# Altium PCB 无线传感K412.PcbDoc (part 2 of 2)
Units mm, origin at the board's own origin, x right, y up, seen from the top; angles counter-clockwise.
Board outline 54.33 x 73.61 mm, 2 copper layers (Top Layer, Bottom Layer); 38 components, 69 nets, 149 pads, 71 vias.
Unrouted connection lines stored in the file: 1.
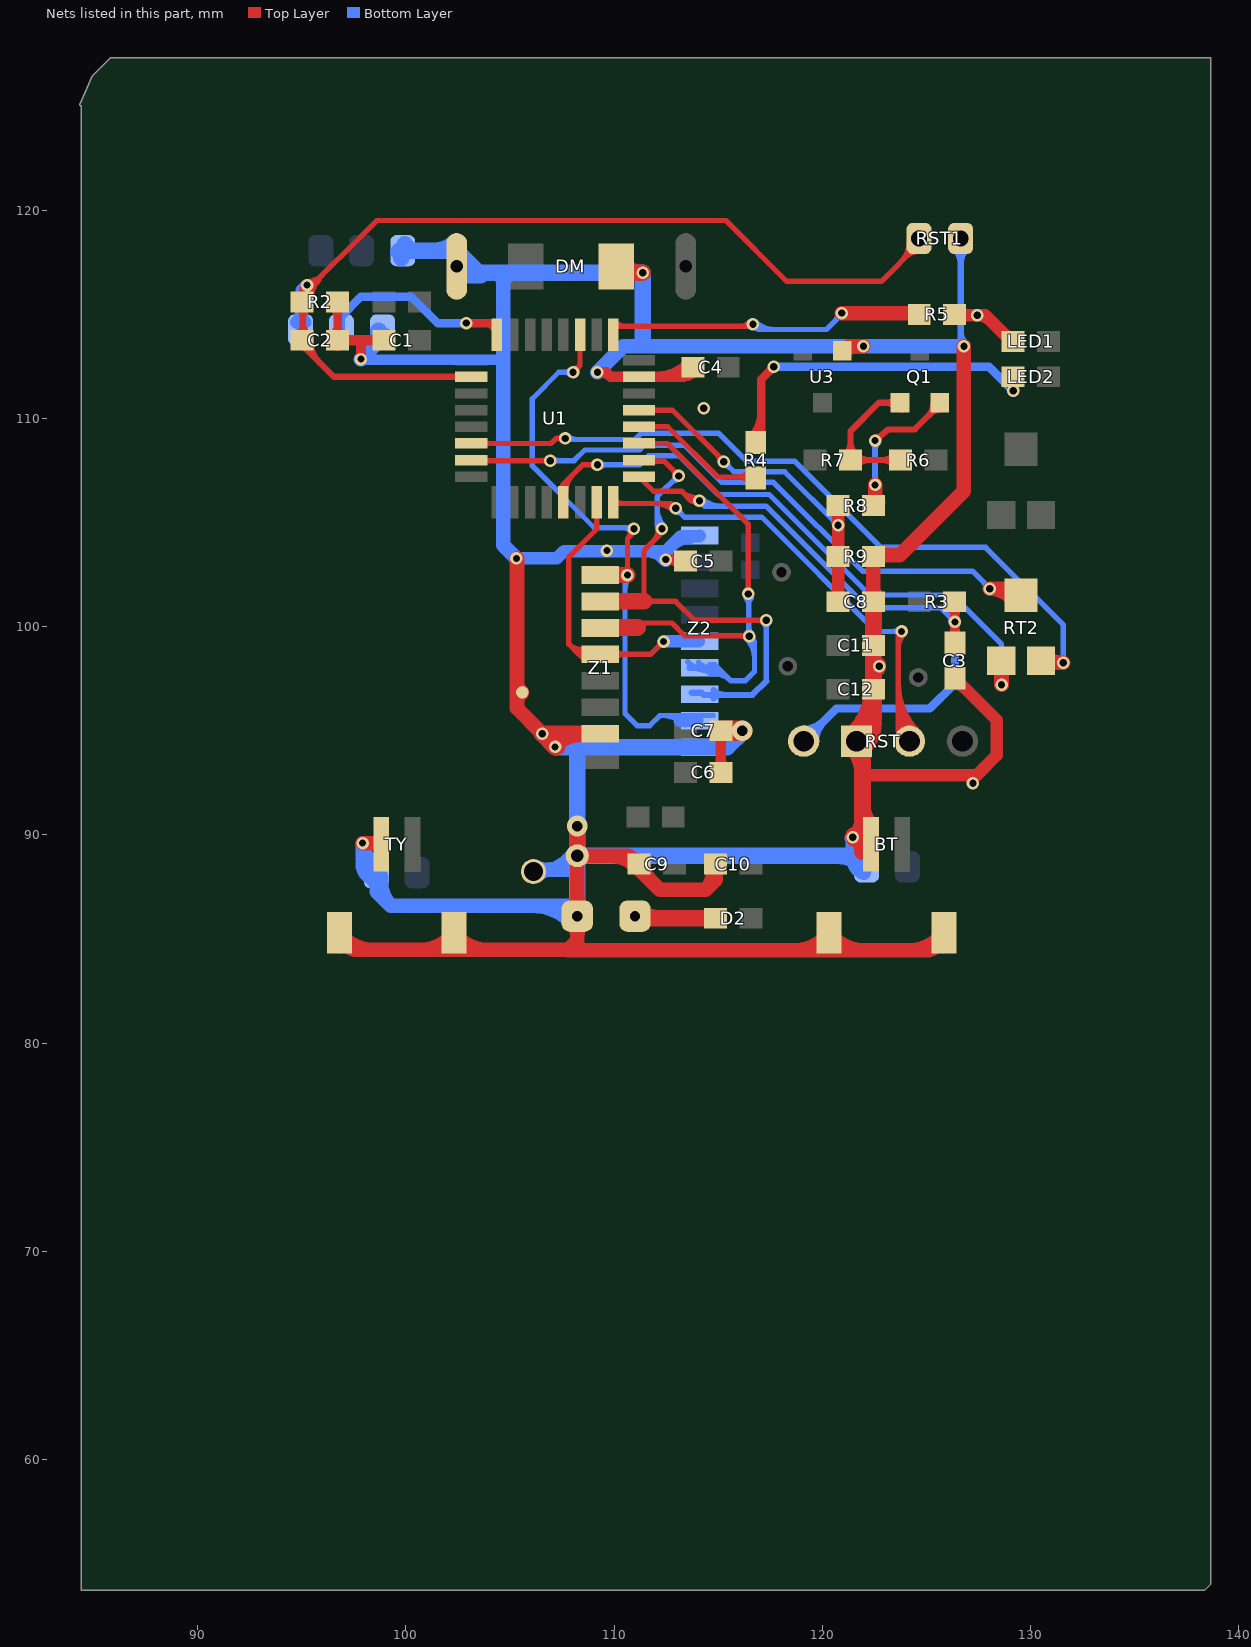
[diagram p2: the nets of this part, all layers, seen from the top]

## Via types
v1: diameter 0.6, hole 0.35, Top Layer to Bottom Layer, 68 vias
v2: diameter 1, hole 0.5, Top Layer to Bottom Layer, 2 vias
v3: diameter 0.9, hole 0.5, Top Layer to Bottom Layer, 1 vias

## Nets (pads, with @x,y where several pads share a name; then routed paths per layer and width w, separated by ;. In a path a pad name is that pad's centre, name@x,y a point inside that pad or via, vN(x,y) a via of type N, cw(c..) or ccw(c..) an arc to the next point about the centre after c; other vN are vias at no path point) (continued)
GND: BT.1 C1.2 C2.2 C3.1 C4.2 C5.2 C6.2 C7.2 C8.1 C9.1 C10.1 C11.1 C12.1 DM.2 pad.0@96.81,85.306 pad.0@98.577,88.189 pad.0@98.882,114.249 pad.0@99.847,118.059 pad.0@102.314,85.306 pad.0@102.442,117.3 pad.0@106.121,88.24 pad.0@108.229,89.002 pad.0@114.1,94.217 pad.0@120.327,85.306 pad.0@122.123,88.468 pad.0@125.831,85.306 pad.3@105.588,96.85 pad.3@108.229,86.1 R2.2 R9.1 RST1.2 RST.2 TY.1 U1.7 U3.1 Z1.7 Z2.8 | length 317.5
  Top Layer w0.254: DM.2@109.995,117.488 110.2,117.282 110.49,116.992 DM.2@110.617,116.865
  Top Layer w0.4: C2.2@96.497,113.969 ccw(c95.952,114.514) 96.723,114.514 ; R2.2@96.497,115.388 cw(c95.952,114.843) 96.723,114.843 ; C2.2@96.723,113.436 R2.2@96.723,115.788 ; 96.723,114.448 ccw(c97.401,114.448) C2.2@96.922,113.969 ; 96.723,114.909 cw(c97.401,114.909) R2.2@96.922,115.388 ; TY.1@98.755,90.5 98.755,89.713 98.781,89.687 TY.1@98.781,89.078
  Top Layer w0.5: C2.2@96.71,113.757 C1.2@99.043,113.757 ; C2.2@96.936,113.58 cw(c97.363,113.153) 97.363,113.757 cw(c97.363,114.361) C2.2@96.936,113.934 ; v1(97.841,112.852) 97.841,113.741 ; C1.2@98.723,113.58 ccw(c98.296,113.153) 98.296,113.757 ccw(c98.296,114.361) C1.2@98.723,113.934 ; v1(109.195,112.217) 109.626,112.217 109.836,112.007 ; v1@109.208,112.169 cw(c109.385,111.557) 109.836,112.007 ; 112.034,112.007 ccw(c112.034,114.156) C4.2@113.553,112.637 ; v1(112.471,103.226) C5.2@113.425,103.226 ; v1@112.587,103.226 cw(c112.587,102.362) C5.2@113.198,102.973 ; C4.2@113.241,112.007 ccw(c113.241,112.949) C4.2@113.907,112.283 ; C4.2@113.78,112.471 113.316,112.007 109.836,112.007 ; C6.2@114.948,93.177 ccw(c114.521,93.604) 115.125,93.604 ccw(c115.729,93.604) C6.2@115.302,93.177 ; C7.2@114.948,94.823 cw(c114.521,94.396) 115.125,94.396 cw(c115.729,94.396) C7.2@115.302,94.823 ; C6.2@115.125,93 C7.2@115.125,95 ; v2(116.15,95) v2@116.18,94.971
  Top Layer w0.6: 122.352,92.862 127.406,92.862 128.372,93.828 128.372,95.513 C3.1@126.36,97.524 ; C3.1@126.36,97.274 cw(c126.36,96.671) C3.1@126.787,97.097
  Top Layer w0.7: pad.0@96.81,85.306 97.636,84.48 ; pad.0@96.884,84.667 cw(c97.105,83.949) 97.636,84.48 ; pad.0@96.987,85.083 ccw(c98.441,86.537) 98.441,84.48 ; pad.0@97.055,84.955 ccw(c97.636,85.073) 97.636,84.48 ; v1(97.917,89.611) 98.654,89.611 TY.1@98.755,89.713 ; 100.683,84.48 ccw(c100.683,86.537) pad.0@102.137,85.083 ; pad.0@102.491,85.083 ccw(c103.945,86.537) 103.945,84.48 ; 105.334,96.358 cw(c106.08,96.358) pad.3@105.552,96.886 ; 105.334,97.343 ccw(c106.08,97.343) pad.3@105.552,96.815 ; v1@105.334,103.276 105.334,96.081 v1(106.553,94.862) ; pad.3@107.947,85.817 cw(c107.264,85.134) 108.229,85.134 cw(c109.195,85.134) pad.3@108.512,85.817 ; pad.3@107.947,86.383 ccw(c107.264,87.066) 108.229,87.066 ccw(c109.195,87.066) pad.3@108.512,86.383 ; 109.808,89.002 cw(c109.808,87.268) C9.1@111.033,88.494 ; 110.61,88.969 ccw(c111.139,89.498) C9.1@111.139,88.75 ; C9.1@110.989,88.597 ccw(c110.578,88.59) 110.578,89.002 ; C9.1@111.389,88.6 ccw(c112.407,88.6) 111.687,87.88 ; C10.1@114.68,88.553 cw(c113.588,88.19) 114.402,87.376 ; C10.1@114.872,88.6 114.872,87.847 114.402,87.376 ; 118.635,84.455 ccw(c118.635,86.598) pad.0@120.15,85.083 ; pad.0@120.504,85.083 ccw(c122.019,86.598) 122.019,84.455 ; U3.1@121.021,113.204 cw(c121.642,112.583) 121.642,113.462 ; U3.1@121.05,113.25 121.262,113.462 v1(121.971,113.462) ; C8.1@122.45,101.606 122.45,103.429 123.723,103.429 126.797,106.502 v1(126.797,113.462) ; 124.139,84.455 ccw(c124.139,86.598) pad.0@125.654,85.083 ; pad.0@125.586,84.954 cw(c124.98,85.072) 124.98,84.455 ; pad.0@125.766,84.665 ccw(c125.554,83.881) 124.98,84.455 ; pad.0@125.831,85.306 124.98,84.455 ; 97.636,84.48 107.798,84.48 ; 107.798,84.48 107.772,84.455 124.98,84.455 ; 107.798,84.48 108.229,84.912 ; 107.798,84.48 108.229,84.48 108.229,84.912 ; 108.229,84.912 pad.3@108.229,86.1 pad.0@108.229,89.002 110.578,89.002 ; 110.578,89.002 110.979,88.6 C9.1@111.189,88.6 111.189,88.378 112.192,87.376 114.402,87.376
  Top Layer w0.8: v1@106.553,94.837 v1(107.163,94.227) ; v1@107.092,94.298 cw(c108.454,92.935) Z1.7@108.454,94.862 ; v1@107.263,94.228 ccw(c106.622,94.222) 106.622,94.862 Z1.7@109.322,94.862 ; pad.0@108.229,89.002 v2(108.229,90.424) ; DM.2@109.757,116.615 DM.2@110.134,116.992 ; DM.2@109.906,116.992 DM.2@110.134,116.992 ; DM.2@110.2,117.304 110.2,117.282 110.2,117.058 DM.2@110.134,116.992 ; DM.2@110.418,116.732 cw(c111.047,116.103) 111.047,116.992 ; DM.2@110.418,117.368 ccw(c111.325,118.275) v1@111.325,116.992 ; v1(111.379,116.992) 110.49,116.992 DM.2@110.134,116.992 ; RST.2@121.393,94.253 cw(c120.099,92.959) 121.928,92.959 ; RST.2@121.393,94.748 ccw(c118.84,97.3) C12.1@122.45,97.3 ; v1@121.519,89.973 cw(c120.995,89.201) 121.928,89.201 ; v1@121.534,89.82 ccw(c120.58,90.773) 121.928,90.773 ; 121.928,89.382 121.928,94.212 RST.2@121.64,94.5 121.64,94.819 122.45,95.629 ; 121.928,91.392 ccw(c123.253,91.392) BT.1@122.316,90.456 ; RST.2@121.958,94.182 ccw(c120.771,95.369) 122.45,95.369 ; RST.2@121.99,94.503 cw(c123.56,94.518) 122.45,95.629 ; 122.45,97.652 cw(c123.176,97.652) v1@122.662,98.166 ; 122.45,98.537 ccw(c123.176,98.537) v1@122.662,98.024 ; C8.1@122.45,101.606 122.45,95.629
  Top Layer w1: C7.2@115.125,95 v2(116.15,95)
  Bottom Layer w0.3: RST1.2@126.322,118.175 cw(c125.554,117.407) 126.64,117.407 cw(c127.726,117.407) RST1.2@126.958,118.175 ; RST1.2@126.441,118.643 126.64,118.445 v1@126.64,113.462 ; 126.64,114.202 ccw(c127.537,114.202) v1@126.903,113.568
  Bottom Layer w0.5: v1(97.841,112.852) 97.841,112.827 104.75,112.827 ; pad.0@106.296,88.543 ccw(c106.719,89.275) 106.937,88.458 ccw(c107.156,87.642) pad.0@106.424,88.065 ; pad.0@106.369,87.992 cw(c106.966,87.395) 106.966,88.24 cw(c106.966,89.085) pad.0@106.369,88.487 ; 107.114,88.24 ccw(c107.114,89.828) pad.0@108.39,88.883 ; pad.0@107.988,89.18 cw(c106.121,90.563) pad.0@106.121,88.24 108.229,88.24 ; pad.0@108.017,88.789 cw(c107.505,88.277) 108.229,88.277 cw(c108.954,88.277) pad.0@108.442,88.789
  Bottom Layer w0.6: v1(105.308,103.276) 107.239,103.276 107.594,103.632 112.319,103.632 ; 111.49,103.632 cw(c111.49,102.244) v1(112.471,103.226) cw(c113.391,103.226) 112.741,103.876 ; v1@112.281,103.416 113.217,104.353 114.076,104.353 Z2.8@114.1,104.377 ; 112.757,103.892 cw(c113.625,103.025) Z2.8@113.625,104.252
  Bottom Layer w0.7: v1(97.841,112.852) pad.0@98.831,113.843 ; 97.917,88.633 ccw(c98.678,88.633) pad.0@98.432,87.913 ; 98.31,113.321 ccw(c97.532,114.099) pad.0@98.632,114.099 ; pad.0@98.401,87.862 cw(c97.913,87.374) 98.603,87.374 ; pad.0@98.571,88.589 cw(c98.547,89.479) 97.917,88.849 ; pad.0@98.577,88.189 97.917,88.849 ; pad.0@98.603,88.468 98.603,87.274 99.277,86.6 ; pad.0@98.658,88.575 cw(c99.011,89.611) v1(97.917,89.611) 97.917,88.849 ; pad.0@98.824,87.999 ccw(c100.42,87.743) 99.277,86.6 ; pad.0@102.442,116.891 pad.0@102.442,117.3 ; 104.673,116.688 104.673,103.911 v1(105.308,103.276) ; 106.057,86.6 cw(c106.057,83.927) pad.3@107.947,85.817 ; pad.3@108.229,86.6 99.277,86.6 ; v1(109.195,112.217) 110.439,113.462 v1(121.971,113.462) 126.64,113.462 v1(126.797,113.462) ; v1@112.281,103.416 v1(112.471,103.226) ; 121.463,88.912 ccw(c122.223,88.912) pad.0@121.978,88.192 ; 121.463,89.002 v1(121.463,89.891) ccw(c122.557,89.891) pad.0@122.204,88.855 ; pad.0@122.116,88.868 cw(c122.092,89.758) 121.463,89.129 pad.0@122.123,88.468
  Bottom Layer w0.8: pad.0@98.679,114.198 pad.0@98.692,114.211 ; pad.0@98.857,113.792 pad.0@99.009,113.944 ; pad.0@99.644,118.008 pad.0@99.657,118.021 ; pad.0@99.771,117.704 pad.0@99.771,118.11 ; pad.0@99.936,118.351 100.228,118.059 102.413,118.059 103.581,116.891 ; 101.378,118.059 ccw(c101.378,119.464) pad.0@102.371,118.471 ; pad.0@102.276,117.98 cw(c102.351,117.671) pad.0@102.576,117.896 ; pad.0@102.442,116.891 103.581,116.891 ; pad.0@102.466,117.203 cw(c102.746,116.056) 103.581,116.891 ; pad.0@102.517,117.367 ccw(c103.581,118.32) 103.581,116.891 ; 104.673,116.688 104.978,116.992 ; v1(106.553,94.862) 107.198,94.217 108.229,94.217 ; pad.3@107.982,86.347 ccw(c107.384,86.945) 108.229,86.945 ccw(c109.074,86.945) pad.3@108.477,86.347 ; pad.3@108.229,86.6 108.229,88.24 pad.0@108.229,89.002 ; 111.379,113.563 v1(111.379,116.992) 104.978,116.992 ; v2@116.18,94.971 115.426,94.217 pad.0@114.1,94.217 108.229,94.217 ; 120.715,89.002 cw(c120.715,87.21) pad.0@121.982,88.477 ; v1@121.463,89.84 121.793,89.84 ; pad.0@121.925,88.594 ccw(c121.463,88.536) 121.463,89.002 pad.0@108.229,89.002 ; 103.581,116.891 103.48,116.992 104.978,116.992 ; pad.0@108.229,89.002 v2(108.229,90.424) 108.229,94.217
  other v1: 127.229,92.481 122.733,98.095 109.652,103.657 114.3,110.49
HX: 
IRQ: U1.11 Z1.1 Z2.1 | length 36
  Top Layer w0.254: v1(108.026,112.217) 108.363,112.554 U1.11@108.363,114.236 ; v1@108.026,112.39 ccw(c108.026,112.808) 108.322,112.513 ccw(c108.617,112.217) v1@108.199,112.217 ; U1.11@108.276,113.413 cw(c108.066,113.203) 108.363,113.203 cw(c108.66,113.203) U1.11@108.45,113.413 ; v1@110.513,102.604 ccw(c110.218,102.9) 110.635,102.9 ccw(c111.053,102.9) v1@110.758,102.604 ; 110.635,104.235 ccw(c110.279,104.591) v1@110.776,104.671 ; v1@110.668,102.514 v1(110.635,102.482) 110.635,104.235 v1@111.036,104.635
  Top Layer w0.76: Z1.1@109.322,102.482 v1(110.635,102.482)
  Bottom Layer w0.254: v1@107.904,112.095 ccw(c107.609,111.8) 107.609,112.217 ccw(c107.609,112.635) v1@107.904,112.34 ; v1(108.026,112.217) 107.34,112.217 106.07,110.947 106.07,107.721 109.042,104.75 v1@110.998,104.75 ; 110.407,104.75 cw(c110.407,104.159) v1@110.825,104.576 ; 110.515,101.775 cw(c111.343,101.775) v1@110.758,102.36 ; v1@110.719,102.514 110.515,102.311 110.515,95.826 111.091,95.25 111.709,95.25 112.192,95.733 Z2.1@114.757,95.733 ; 112.313,95.733 cw(c112.313,94.175) Z2.1@113.414,95.276 ; 112.926,95.733 cw(c112.926,94.788) Z2.1@113.594,95.456
  Bottom Layer w0.6: 113.157,95.479 Z2.1@113.995,95.479
  other v1: 110.947,104.699
L+: 
L-: 
L-G-D: 
L-R-D: 
L-R-R: LED1.1 R5.2 | length 4.8
  Top Layer w0.6: R5.2@126.35,114.96 v1(127.432,114.96) ; R5.2@126.541,115.141 ccw(c126.978,115.578) 126.978,114.96 ; 128.082,114.691 ccw(c127.432,114.041) v1(127.432,114.96) ; LED1.1@128.713,114.06 ccw(c129.1,114.448) LED1.1@129.1,113.9 ; LED1.1@128.987,113.787 127.813,114.96 v1(127.432,114.96)
LED2: R4.1 U1.4 | length 8.7
  Top Layer w0.254: U1.4@111.188,109.6 112.574,109.6 114.986,107.188 116.637,107.188 R4.1@116.916,107.467 ; U1.4@111.8,109.513 cw(c112.01,109.303) 112.01,109.6 cw(c112.01,109.897) U1.4@111.8,109.687 ; 115.871,107.188 ccw(c115.871,108.129) R4.1@116.536,107.464 ; 115.928,107.188 cw(c115.928,106.328) R4.1@116.536,106.936
LED2-R: LED2.1 R4.2 | length 18.5
  Top Layer w0.4: R4.2@116.588,109.112 ccw(c115.427,110.273) 117.069,110.273 ; R4.2@117.069,108.534 117.069,111.887 v1(117.665,112.484) ; LED2.1@129.148,112.002 LED2.1@129.15,112
  Top Layer w0.6: LED2.1@129.009,111.859 cw(c128.645,111.495) v1@129.159,111.495 ; v1(129.159,111.328) LED2.1@129.159,112
  Bottom Layer w0.4: v1(117.665,112.484) 128.003,112.484 v1(129.159,111.328)
MISO: U1.2 Z1.2 Z2.2 | length 33.7
  Top Layer w0.254: Z1.2@109.169,101.219 112.954,101.219 113.868,100.305 v1(117.297,100.305) ; Z1.2@110.007,101.001 cw(c110.533,100.476) 110.533,101.219 ; Z1.2@110.007,101.423 ccw(c110.499,101.915) 110.499,101.219 ; U1.2@110.896,107.95 112.395,107.95 v1@113.081,107.264 ; 111.43,101.22 111.43,103.657 112.293,104.521 v1(112.293,104.699) ; U1.2@111.8,108.087 ccw(c112.13,108.418) 112.13,107.95 ; 111.872,104.1 ccw(c111.273,104.699) v1@112.12,104.699 ; v1@112.933,107.239 ccw(c112.516,107.239) 112.811,107.534 ccw(c113.106,107.829) v1@113.106,107.412 ; v1@117.175,100.182 ccw(c116.88,99.887) 116.88,100.305 ccw(c116.88,100.722) v1@117.175,100.427
  Top Layer w0.8: Z1.2@109.652,101.22 111.43,101.22
  Bottom Layer w0.254: 112.065,105.055 ccw(c112.65,105.055) v1@112.236,104.642 ; 112.065,105.668 ccw(c113.263,105.668) v1@112.416,104.821 ; v1@112.236,104.699 112.065,104.87 112.065,106.248 v1@113.081,107.264 ; 112.724,106.908 cw(c113.106,106.526) v1@113.106,107.066 ; 112.847,107.03 ccw(c112.638,107.239) v1@112.933,107.239 ; v1@117.175,100.182 cw(c116.88,99.887) 117.297,99.887 cw(c117.715,99.887) v1@117.42,100.182 ; 117.297,97.384 v1(117.297,100.305)
  Bottom Layer w0.3: Z2.2@113.722,96.825 114.198,96.825 114.3,96.723 116.637,96.723 117.297,97.384 ; Z2.2@114.769,96.563 cw(c115.157,96.175) 115.157,96.723 ; Z2.2@114.769,96.951 ccw(c115.32,97.502) 115.32,96.723
  other v1: 113.106,107.239
MOSI: U1.3 Z1.3 Z2.3 | length 39.5
  Top Layer w0.254: Z1.3@108.915,99.974 109.118,100.178 112.776,100.178 113.386,99.568 v1@116.459,99.568 ; Z1.3@109.828,99.911 cw(c110.472,99.267) 110.472,100.178 ; Z1.3@110.007,99.731 cw(c111.085,98.654) 111.085,100.178 ; 111.125,99.974 111.201,100.051 ; U1.3@111.188,108.8 112.561,108.8 116.434,104.927 v1(116.434,101.575) ; U1.3@111.8,108.713 cw(c112.01,108.503) 112.01,108.8 cw(c112.01,109.097) U1.3@111.8,108.887 ; v1@116.332,101.727 ccw(c116.098,101.961) 116.429,101.961 ; 116.438,101.982 ccw(c116.943,101.982) v1@116.586,101.625 ; 116.005,99.568 cw(c116.005,99.064) 116.362,99.42 ccw(c116.005,99.064) 116.005,99.568 ; 116.128,99.568 ccw(c116.128,99.899) 116.362,99.665 cw(c116.128,99.899) 116.128,99.568
  Top Layer w0.8: Z1.3@109.322,99.96 111.125,99.96
  Bottom Layer w0.254: Z2.3@113.539,98.314 ccw(c114.681,99.456) Z2.3@114.681,97.841 ; Z2.3@114.049,98.287 ccw(c114.757,98.995) Z2.3@114.757,97.993 ; Z2.3@114.579,98.171 114.833,98.171 115.595,97.409 ; Z2.3@114.581,97.983 cw(c114.694,97.222) 115.238,97.766 ; Z2.3@114.618,97.732 cw(c114.786,96.599) 115.595,97.409 ; v1@116.337,101.367 cw(c116.041,101.071) 116.459,101.071 cw(c116.877,101.071) v1@116.581,101.367 ; v1@116.362,99.42 cw(c115.454,98.512) 116.738,98.512 ; 116.459,101.244 116.459,99.568 116.738,99.289 116.738,97.841 116.307,97.409 115.595,97.409 ; v1@116.464,99.469 cw(c115.8,98.806) 116.738,98.806 ; v1@116.542,99.6 cw(c116.067,99.125) 116.738,99.125 ; v1@116.649,99.488 ccw(c117.129,99.329) 116.691,99.076 ; v1@116.362,99.665 ccw(c116.128,99.899) 116.459,99.899 cw(c116.128,99.899) v1@116.362,99.665 ; 116.459,100.022 ccw(c116.963,100.022) 116.607,99.665 cw(c116.963,100.022) 116.459,100.022
  Bottom Layer w0.3: Z2.3@113.617,98.027 Z2.3@114.1,98.027
  other v1: 116.484,99.543
PB7: C8.2 R8.1 R9.2 U1.5 | length 18.6
  Top Layer w0.254: U1.5@111.188,110.4 112.79,110.4 v1(115.265,107.925) ; U1.5@111.8,110.313 cw(c112.01,110.103) 112.01,110.4 cw(c112.01,110.697) U1.5@111.8,110.487 ; v1@115.092,107.925 ccw(c114.675,107.925) 114.97,108.22 ccw(c115.265,108.515) v1@115.265,108.098
  Top Layer w0.6: C8.2@120.75,101.2 R9.2@120.75,103.378 R8.1@120.75,105.5
  Bottom Layer w0.254: v1@115.265,107.752 cw(c115.265,107.334) 115.561,107.629 cw(c115.856,107.925) v1@115.438,107.925 ; v1(115.265,107.925) 115.748,107.442 118.186,107.442 v1(120.752,104.877) ; v1@120.579,104.877 ccw(c120.161,104.877) 120.456,105.172 ccw(c120.752,105.467) v1@120.752,105.05
Q1-B: Q1.1 R6.2 R7.2 | length 12.9
  Top Layer w0.3: R7.2@121.102,108.247 ccw(c120.505,108.845) 121.35,108.845 ccw(c122.195,108.845) R7.2@121.597,108.247 ; R7.2@121.647,107.753 cw(c122.245,107.155) 122.245,108 cw(c122.245,108.845) R7.2@121.647,108.247 ; R6.2@123.453,107.753 ccw(c122.855,107.155) 122.855,108 ccw(c122.855,108.845) R6.2@123.453,108.247 ; Q1.1@123.518,110.538 ccw(c123.006,110.026) 123.006,110.75 ccw(c123.006,111.474) Q1.1@123.518,110.962 ; Q1.1@123.85,110.414 Q1.1@123.85,110.846 ; Q1.1@123.85,110.75 122.713,110.75 121.35,109.387 R7.2@121.35,108 R6.2@123.95,108
  Top Layer w0.4: Q1.1@123.85,110.541 Q1.1@123.85,110.846
Q1-E: Q1.2 R8.2 | length 10.1
  Top Layer w0.3: v1(122.53,108.941) 123.165,109.474 124.435,109.474 125.674,110.713 Q1.2@125.674,110.699 ; v1@122.543,109.09 ccw(c122.574,109.451) 122.807,109.174 ccw(c123.04,108.896) v1@122.679,108.928 ; R8.2@122.606,105.689 R8.2@122.631,105.715 ; 125.079,110.118 ccw(c124.472,110.725) Q1.2@125.33,110.725 ; 125.213,110.252 cw(c125.63,109.835) Q1.2@125.63,110.425
  Top Layer w0.7: R8.2@122.403,105.689 R8.2@122.682,105.969 ; R8.2@122.53,106.02 v1(122.53,106.807)
  Bottom Layer w0.3: v1@122.424,106.913 ccw(c122.167,107.169) 122.53,107.169 ccw(c122.892,107.169) v1@122.636,106.913 ; v1@122.424,108.835 cw(c122.167,108.578) 122.53,108.578 cw(c122.892,108.578) v1@122.636,108.835 ; v1(122.53,106.807) v1(122.53,108.941)
Q4-B: 
R1R: 
R5: 
R19: 
RST: C3.2 R3.2 RST.1 U1.1 | length 41.8
  Top Layer w0.254: U1.1@111.188,107.2 111.886,106.502 113.233,106.502 ; 113.598,106.138 ccw(c114.028,106.568) v1@114.107,105.965 ; v1@113.972,105.925 ccw(c113.69,105.654) 113.69,106.045 ; v1@113.972,106.165 cw(c113.69,106.436) 113.69,106.045 ; v1@114.074,106.217 cw(c113.943,107.212) 113.233,106.502 ; v1(114.097,106.045) 113.69,106.045 ; 113.233,106.502 113.69,106.045
  Top Layer w0.4: R3.2@126.138,100.988 cw(c125.589,100.439) v1@126.365,100.439 ; C3.2@126.148,99.486 ccw(c125.624,100.01) v1@126.365,100.01 ; v1@126.278,100.178 cw(c125.903,99.961) 126.322,99.849 ; v1@126.278,100.278 ccw(c125.908,100.492) 126.321,100.603 ; C3.2@126.365,99.136 R3.2@126.365,101.092 ; v1@126.365,99.986 ccw(c127.072,99.986) C3.2@126.572,99.486 ; v1@126.365,100.512 cw(c127.038,100.512) R3.2@126.562,100.988 ; 126.402,100.652 ccw(c126.878,100.524) v1@126.452,100.278 ; 126.406,99.833 cw(c126.846,99.951) v1@126.452,100.178
  Bottom Layer w0.254: v1@114.04,105.988 ccw(c114.514,106.463) 114.514,105.791 ; v1(114.097,106.045) 114.351,105.791 117.29,105.791 122.167,100.914 125.679,100.914 v1(126.365,100.228) ; v1@114.219,106.167 ccw(c115.128,107.076) 115.128,105.791 ; RST.1@119.572,94.182 RST.1@119.572,94.5 ; v1@126.192,100.228 ccw(c125.774,100.228) 126.07,100.524 ccw(c126.365,100.819) v1@126.365,100.401
  Bottom Layer w0.4: RST.1@119.1,94.5 120.672,96.072 125.155,96.072 126.365,97.282 v1(126.365,100.228) ; RST.1@119.1,95.05 ccw(c119.1,96.378) 120.039,95.439 ccw(c120.978,94.5) RST.1@119.65,94.5
RT1-S: 
RT1-X: 
RT2: 
RT2-S: 
RT2-X: 
SCK: U1.31 Z1.4 Z2.4 | length 19.6
  Top Layer w0.254: 108.107,98.877 ccw(c108.599,99.369) Z1.4@108.832,98.713 ; 108.392,98.593 ccw(c108.748,98.949) Z1.4@108.917,98.474 ; Z1.4@108.593,98.516 ccw(c108.313,98.343) 108.313,98.672 ; Z1.4@108.593,98.828 cw(c108.313,99.001) 108.313,98.672 ; Z1.4@108.747,98.953 cw(c108.45,99.789) 107.823,99.162 ; U1.31@109.076,105.363 cw(c108.866,105.153) 109.163,105.153 cw(c109.46,105.153) U1.31@109.25,105.363 ; U1.31@109.163,106.186 109.163,104.692 107.823,103.353 107.823,99.162 ; Z1.4@110.007,98.461 cw(c110.516,97.953) 110.516,98.672 cw(c110.516,99.391) Z1.4@110.007,98.883 ; v1@112.197,99.289 cw(c111.779,99.289) 112.074,98.993 cw(c112.37,98.698) v1@112.37,99.116 ; v1(112.37,99.289) 111.753,98.672 Z1.4@109.322,98.672 108.313,98.672 ; 107.823,99.162 108.313,98.672
  Bottom Layer w0.6: v1(112.37,99.289) 112.378,99.297 Z2.4@114.071,99.297
SWIM: RST.3 U1.32 | length 34.5
  Top Layer w0.254: U1.32@109.963,105.918 112.725,105.918 ; U1.32@110.05,106.062 ccw(c110.397,106.41) 110.397,105.918 ; 111.984,105.918 cw(c111.984,104.72) v1@112.831,105.567 ; 112.597,105.918 cw(c112.597,105.333) v1@113.011,105.747 ; v1@112.784,105.723 ccw(c112.573,105.766) 112.725,105.918 ; v1@112.92,105.859 cw(c112.878,106.07) 112.725,105.918 ; v1(112.954,105.689) 112.725,105.918 ; 123.647,95.451 ccw(c125.131,95.451) RST.3@124.082,94.402 ; 123.647,96.064 ccw(c125.744,96.064) RST.3@124.261,94.581 ; 123.647,96.677 ccw(c126.357,96.677) RST.3@124.441,94.761 ; 123.647,97.29 ccw(c126.97,97.29) RST.3@124.621,94.941 ; 123.647,98.985 cw(c124.587,98.985) v1@123.922,99.649 ; v1@123.661,99.669 cw(c123.551,99.588) 123.647,99.492 ; RST.3@123.665,94.85 ccw(c123.545,94.931) 123.647,95.033 ; RST.3@123.83,95.016 cw(c123.749,95.135) 123.647,95.033 ; v1@123.927,99.771 123.647,99.492 ; RST.3@124.18,94.5 123.647,95.033 ; 123.647,95.033 123.647,99.492
  Bottom Layer w0.254: v1@112.954,105.516 cw(c112.954,105.099) 113.249,105.394 cw(c113.544,105.689) v1@113.127,105.689 ; v1(112.954,105.689) 113.386,105.258 117.094,105.258 122.58,99.771 v1@123.927,99.771 ; v1@123.678,99.649 ccw(c123.382,99.354) 123.382,99.771 ccw(c123.382,100.189) v1@123.678,99.894
  other v1: 123.8,99.771
SWIM/FM: 
T-LED: R5.1 U1.9 | length 19.4
  Top Layer w0.254: U1.9@109.963,114.025 109.963,114.427 v1@116.662,114.427 ; U1.9@110.05,114.637 ccw(c110.556,115.144) 110.556,114.427 ; 115.999,114.427 ccw(c115.999,115.192) v1@116.54,114.651
  Top Layer w0.7: v1(120.929,115.062) 124.588,115.062 R5.1@124.65,115 ; 124.088,115.062 cw(c124.088,114.488) R5.1@124.494,114.894
  Bottom Layer w0.254: v1@116.605,114.471 ccw(c117.08,114.946) 117.08,114.275 ; v1(116.662,114.529) 116.916,114.275 120.193,114.275 v1@120.98,115.062 ; v1@116.785,114.651 ccw(c117.693,115.559) 117.693,114.275 ; 120.598,114.68 ccw(c120.216,115.062) v1@120.756,115.062 ; 120.721,114.803 cw(c120.929,114.594) v1@120.929,114.889
TEMP: 
WXCD: D2.2 pad.3@111,86.1 | length 4.5
  Top Layer w0.8: pad.3@111.247,86.347 ccw(c112.086,87.186) 112.086,86 ; pad.3@111.263,86.086 pad.3@111.277,86.1 ; pad.3@111.291,86 D2.2@114.872,86
Y30: 
Y>: 
YS: C2.1 pad.0@94.945,114.249 R2.1 RST1.1 U1.18 | length 61.8
  Top Layer w0.254: v1@95.083,116.363 cw(c94.569,116.226) 94.945,115.849 98.603,119.507 115.367,119.507 118.288,116.586 122.834,116.586 124.639,118.39 RST1.1@124.639,118.643 ; R2.1@95.179,115.6 cw(c96.344,115.6) v1@95.52,116.424 ; v1@95.248,116.327 ccw(c95.265,116.973) 95.813,116.632 ; v1@95.25,116.581 ccw(c95.25,117.612) 95.979,116.883 ; R2.1@95.433,115.6 cw(c97.211,115.6) 95.954,116.858 ; 123.759,117.51 ccw(c122.775,118.493) RST1.1@124.166,118.493 ; 124.007,117.759 cw(c124.639,117.127) RST1.1@124.639,118.02 ; RST1.1@124.192,117.944 ccw(c123.642,118.493) RST1.1@124.42,118.493
  Top Layer w0.3: C2.1@94.812,114.004 ccw(c94.246,114.571) 95.047,114.571 ; R2.1@94.812,115.353 cw(c94.246,114.786) 95.047,114.786 ; R2.1@94.856,115.885 ccw(c94.591,116.256) v1@95.047,116.256 ; C2.1@95.047,113.411 v1@95.047,116.256 ; 95.047,114.633 ccw(c95.936,114.633) C2.1@95.307,114.004 ; 95.047,114.724 cw(c95.936,114.724) R2.1@95.307,115.353 ; R2.1@95.047,115.556 cw(c96.103,115.556) v1@95.356,116.302 ; C2.1@95.11,113.757 ccw(c95.913,113.757) 95.345,113.189 ; C2.1@95.193,113.341 96.534,112 U1.18@103.138,112 ; R2.1@95.246,115.897 cw(c95.471,116.256) v1@95.047,116.256 ; C2.1@95.41,113.757 ccw(c96.937,113.757) 95.857,112.677
  Bottom Layer w0.6: pad.0@94.733,114.611 ccw(c94.098,115.246) 94.996,115.246 ; pad.0@94.996,114.249 94.996,116.154 v1(95.25,116.408) ccw(c95.863,115.795) 94.996,115.795 ; 94.996,115.001 ccw(c95.547,115.001) pad.0@95.157,114.611
YS+: RT2.2 U1.22 | length 38.6
  Top Layer w0.254: U1.22@103.138,108.8 106.971,108.8 107.213,109.042 v1(107.645,109.042) ; U1.22@103.75,108.713 cw(c103.96,108.503) 103.96,108.8 cw(c103.96,109.097) U1.22@103.75,108.887 ; v1@107.523,108.92 ccw(c107.228,108.625) 107.228,109.042 ccw(c107.228,109.46) v1@107.523,109.165 ; RT2.2@130.49,98.367 RT2.2@130.585,98.273
  Top Layer w0.7: RT2.2@130.585,98.273 v1(131.572,98.273) ; RT2.2@130.72,98.597 ccw(c131.503,99.38) v1@131.503,98.273
  Bottom Layer w0.254: v1@107.645,109.144 107.798,108.991 111.005,108.991 111.31,109.296 115.011,109.296 116.357,107.95 118.669,107.95 122.809,103.81 127.838,103.81 131.572,100.076 v1(131.572,98.273) ; v1@107.768,109.165 ccw(c108.185,109.582) 108.185,108.991 ; v1@131.45,98.395 ccw(c131.154,98.69) 131.572,98.69 ccw(c131.99,98.69) v1@131.694,98.395
YS-: RT2.1 U1.29 | length 34.1
  Top Layer w0.254: U1.29@107.432,106.5 cw(c107.964,106.5) 107.588,106.876 ; U1.29@107.476,106.587 ccw(c107.266,106.797) 107.563,106.797 ccw(c107.86,106.797) U1.29@107.65,106.587 ; U1.29@107.563,106.186 107.563,106.852 108.483,107.772 v1(109.195,107.772) ; U1.29@107.686,106.5 cw(c108.831,106.5) 108.021,107.31 ; v1@109.072,107.65 ccw(c108.777,107.355) 108.777,107.772 ccw(c108.777,108.19) v1@109.072,107.895 ; RT2.1@128.59,98.367 RT2.1@128.6,98.357
  Top Layer w0.7: RT2.1@128.36,98.137 cw(c127.78,97.558) 128.6,97.558 ; v1(128.6,97.206) RT2.1@128.6,98.357 ; 128.6,97.607 cw(c129.35,97.607) RT2.1@128.82,98.137
  Bottom Layer w0.254: v1(109.195,107.772) 111.223,107.772 111.655,108.204 113.132,108.204 114.986,106.35 117.45,106.35 122.276,101.524 126.238,101.524 128.6,99.162 v1(128.6,97.206) ; v1@109.317,107.65 cw(c109.612,107.355) 109.612,107.772 cw(c109.612,108.19) v1@109.317,107.895 ; v1@128.478,97.328 ccw(c128.183,97.623) 128.6,97.623 ccw(c129.018,97.623) v1@128.723,97.328
YS-RT: RT2.3 U1.23 | length 33.3
  Top Layer w0.254: U1.23@103.138,107.975 v1@107.137,107.975 ; U1.23@103.75,108.087 ccw(c104.019,108.357) 104.019,107.975 ; v1@106.812,107.853 ccw(c106.516,107.558) 106.516,107.975 ccw(c106.516,108.393) v1@106.812,108.098
  Top Layer w0.7: RT2.3@129.177,101.252 ccw(c128.041,100.423) v1(128.041,101.829) RT2.3@129.464,101.829
  Bottom Layer w0.254: v1(106.934,107.975) 108.077,107.975 108.585,108.483 111.216,108.483 111.444,108.712 113.386,108.712 115.164,106.934 117.653,106.934 121.92,102.667 127.203,102.667 v1(128.041,101.829) ; v1@107.056,107.853 cw(c107.352,107.558) 107.352,107.975 cw(c107.352,108.393) v1@107.056,108.098 ; v1@127.868,101.829 ccw(c127.451,101.829) 127.746,102.124 ccw(c128.041,102.419) v1@128.041,102.002
YS-U: 
YS_D: 
YSD: pad.0@96.901,114.249 U1.16 | length 9.2
  Top Layer w0.4: v1(102.895,114.579) 104.019,114.579 U1.16@104.363,114.236
  Bottom Layer w0.4: pad.0@96.876,114.224 96.876,114.884 97.841,115.849 100.254,115.849 101.524,114.579 v1(102.895,114.579)
ZL+: 
pads on no net: U1.10 U1.13 U1.14 U1.24 U1.25 U1.26 U1.27 U1.28

## Polygon pours and split planes (outlines as drawn)
GND on Top Layer "Top Layer-No Net" (hatched 45Degree grid 0.508 track 0.203, remove dead copper, pour order 8): 104.394,83.515 104.394,88.697 126.761,88.697 126.761,83.515
GND on Top Layer "Bottom Layer-No Net" (hatched 45Degree grid 0.508 track 0.25, remove dead copper, pour order 10): 94.031,115.57 94.041,115.56 94.041,113.899 94.041,113.442 94.752,112.731 95.362,112.121 101.305,112.121 102.067,111.359 102.067,105.441 102.525,105.441 102.626,105.339 103.337,104.628 104.919,103.046 104.919,102.806 106.124,102.806 106.131,102.799 106.309,102.977 106.538,102.977 106.538,115.093 106.004,115.626
GND on Bottom Layer "Top Layer-No Net" (solid, remove dead copper, pour order 7): 127.251,120.487 127.307,120.432 127.963,120.432 127.963,120.382 127.988,120.357 128.026,120.319 128.026,119.992 128.026,117.704 128.064,117.666 128.572,117.163 128.572,116.485 128.877,116.485 129.741,115.63 129.908,115.464 130.526,115.464 131.96,115.464 132.027,115.529 132.093,115.464 132.266,115.464 132.398,115.464 132.509,115.353 132.666,115.198 132.666,115.068 132.666,91.992 132.687,91.971 132.585,91.87 132.585,91.166 132.283,91.166 132.104,90.99 130.477,90.99 130.477,88.911 130.376,88.81 130.376,88.577 130.252,88.577 130.09,88.416 127.343,88.416 127.175,88.25 127.023,88.401 104.348,88.401 104.348,115.35 104.442,115.444 104.305,115.58 94.043,115.58 94.043,119.614 94.082,119.653 93.927,119.806 93.927,120.256 94.359,120.256 94.582,120.476 94.593,120.487 127.526,120.487
GND on Bottom Layer "Top Layer-No Net" (solid, remove dead copper, pour order 12): 104.396,83.467 104.396,88.7 126.763,88.7 126.763,83.467
GND on Bottom Layer "Bottom Layer-No Net" (solid, pour order 11): 94.021,115.59 94.031,115.58 94.031,113.919 94.031,113.462 94.742,112.751 95.352,112.141 101.295,112.141 102.057,111.379 102.057,105.461 102.514,105.461 102.616,105.359 103.327,104.648 104.909,103.066 104.909,102.826 106.114,102.826 106.121,102.819 106.299,102.997 106.528,102.997 106.528,115.113 105.994,115.646

## Keep-outs
Keep-Out Layer:
  circle w0.1: c130.466,93.302 r1.15
  circle w0.1: c120.966,118.482 r1.15
  circle w0.1: c92.01,107.95 r1.15
  lines w0.1: 90.472,90.982 92.396,90.982 ; 90.472,90.99 cw(c90.472,91.69) 89.772,91.69 89.772,115.207 cw(c90.272,115.207) 90.272,115.707 91.792,115.707 ccw(c91.792,118.207) 94.292,118.207 ; 92.396,88.882 92.396,90.983 ; 92.397,88.882 ccw(c92.897,88.882) 92.897,88.382 95.793,88.382 95.793,83.464 126.761,83.464 126.761,88.382 129.572,88.382 ccw(c129.572,88.882) 130.072,88.882 ; 94.288,118.207 94.288,120.071 cw(c94.788,120.071) 94.788,120.571 ; 94.797,120.582 127.732,120.582 cw(c127.732,120.082) 128.232,120.082 ; 128.237,120.082 128.237,118.207 ccw(c130.737,118.207) 130.737,115.707 ; 130.083,88.882 130.083,90.982 131.972,90.982 ; 130.732,115.707 132.172,115.707 cw(c132.172,115.207) 132.672,115.207 132.672,91.644 ; 131.972,90.99 ccw(c131.972,91.69) 132.672,91.69 ; 91.059,93.415 91.059,104.318 92.151,105.41 102.616,105.41 103.327,104.699 103.327,92.913 102.413,91.999 92.192,91.999 91.059,93.415

## Silkscreen, mask and mechanical layers (free items; w line width, h text height)
Top Overlay:
  lines w0.2: 108.243,85.471 108.243,85.194 ccw(c108.591,85.194) 108.939,85.214 ; 108.972,85.2 ccw(c109.321,85.2) 109.668,85.219 ; 109.693,85.219 ccw(c110.041,85.219) 110.389,85.239 ; 110.418,85.219 ccw(c110.766,85.219) 111.114,85.239 ; 111.125,85.268 111.125,85.544
  text "Z:12Q" at 90.78,102.108 h0.7 r90
  text "IRQ" at 111.074,102.108 h0.7
  text "MISO" at 111.074,100.863 h0.7
  text "MOSI" at 111.074,99.695 h0.7
  text "SCK" at 111.074,98.298 h0.7
  text "O:45mm" at 90.754,97.358 h0.7 r90
  text "M1" at 105.816,97.104 h1.6 r90
  text "CSN" at 111.074,97.028 h0.7
  text "CE" at 111.074,95.758 h0.7
  text "3.3" at 128.372,95.377 h0.9 r270
  text "GND" at 110.947,94.539 h0.6
  text "3V" at 111.074,93.142 h0.7
  text "X:0.25" at 90.78,92.862 h0.7 r90
  text "+" at 124.562,90.475 h2.5
  text "+" at 103.149,88.519 h2
  text "L" at 106.147,85.293 h1
Bottom Overlay:
  lines w0.16: 118.669,94.259 119.736,94.259 119.888,94.412 119.888,102.921 119.634,103.175 118.821,103.175 ; 118.72,95.428 120.294,95.428 120.371,95.504 120.371,104.242 120.142,104.47 118.872,104.47
  lines w0.25: 100.787,117.678 101.143,117.323 101.143,115.773 101.295,115.621 101.295,115.595 101.549,115.341
  lines w0.254: 90.373,91.669 112,91.669 ; 90.5,105.664 112,105.664 ; 103.962,92.669 112.852,92.669 ; 103.962,104.664 112.141,104.664
  lines w0.5: 95.021,113.03 96.749,113.03 ; 97.917,119.329 99.644,119.329
  text "FL" at 97.206,119.38 h1
  text "3V" at 96.876,115.773 h1
  text "GND" at 102.692,113.868 h1
  text "YSD" at 93.98,113.563 h1
  text "YS" at 96.672,111.277 h1
  text "CC61219102" at 103.759,107.747 h1
  text "GND" at 116.18,103.937 h0.85
  text "3V3" at 116.18,102.768 h0.85
  text "CE" at 116.18,101.498 h0.85
  text "CSN" at 116.18,100.076 h0.85
  text "SCK" at 116.18,98.781 h0.85
  text "MOSI" at 116.18,97.587 h0.85
  text "MISO" at 116.18,96.241 h0.85
  text "IRQ" at 116.18,95.047 h0.85
  text "GND" at 116.18,93.777 h0.85
  text "RST" at 119.558,93.167 h0.85 r90
  text "GND" at 121.996,93.142 h0.85 r90
  text "SWIM" at 124.536,93.116 h0.85 r90
  text "3V3" at 127.025,93.015 h0.85 r90
  text "GND" at 111.608,88.621 h0.85